# Altium PCB PCB3.PcbDoc
Units mil, origin at the board's own origin, x right, y up, seen from the top; angles counter-clockwise.
Board outline 2380 x 3440 mil, 2 copper layers (Top Layer, Bottom Layer); 76 components, 82 nets, 292 pads, 50 vias.
Unrouted connection lines stored in the file: 74.
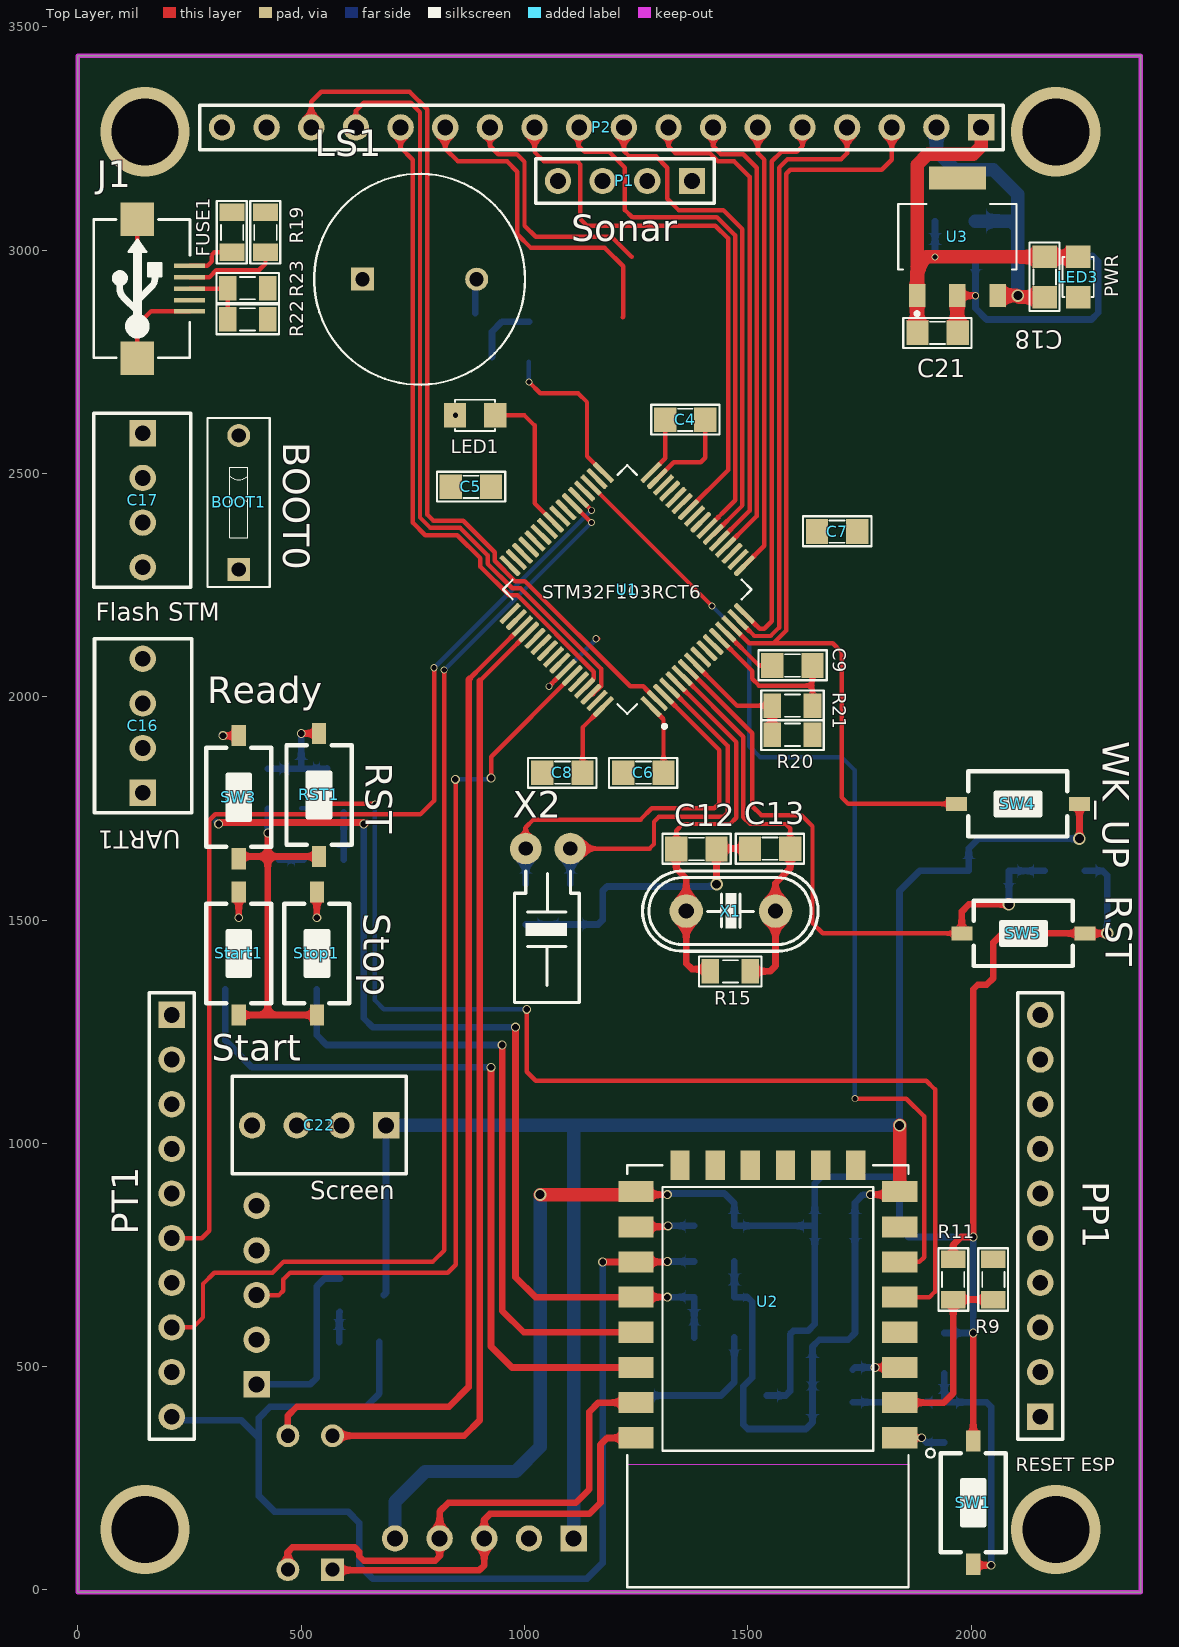
[diagram p0: Top Layer view]
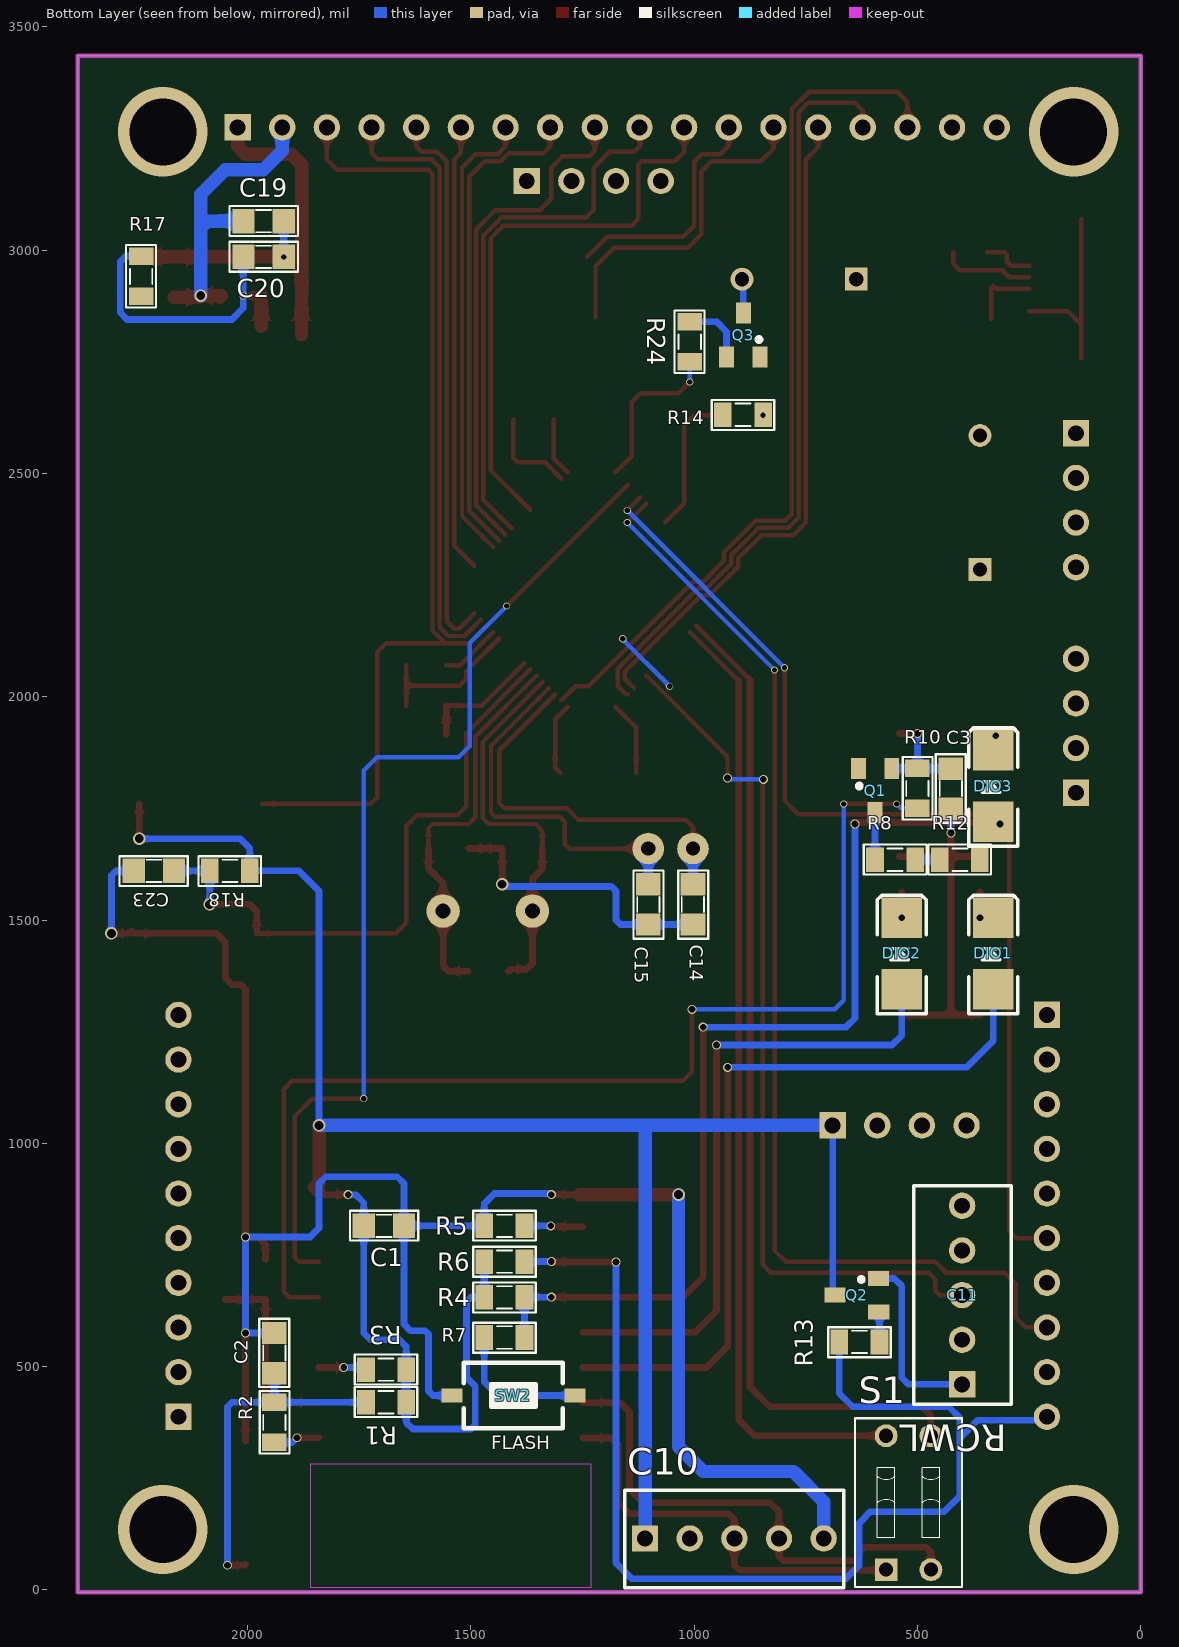
[diagram p1: Bottom Layer view, seen from below]
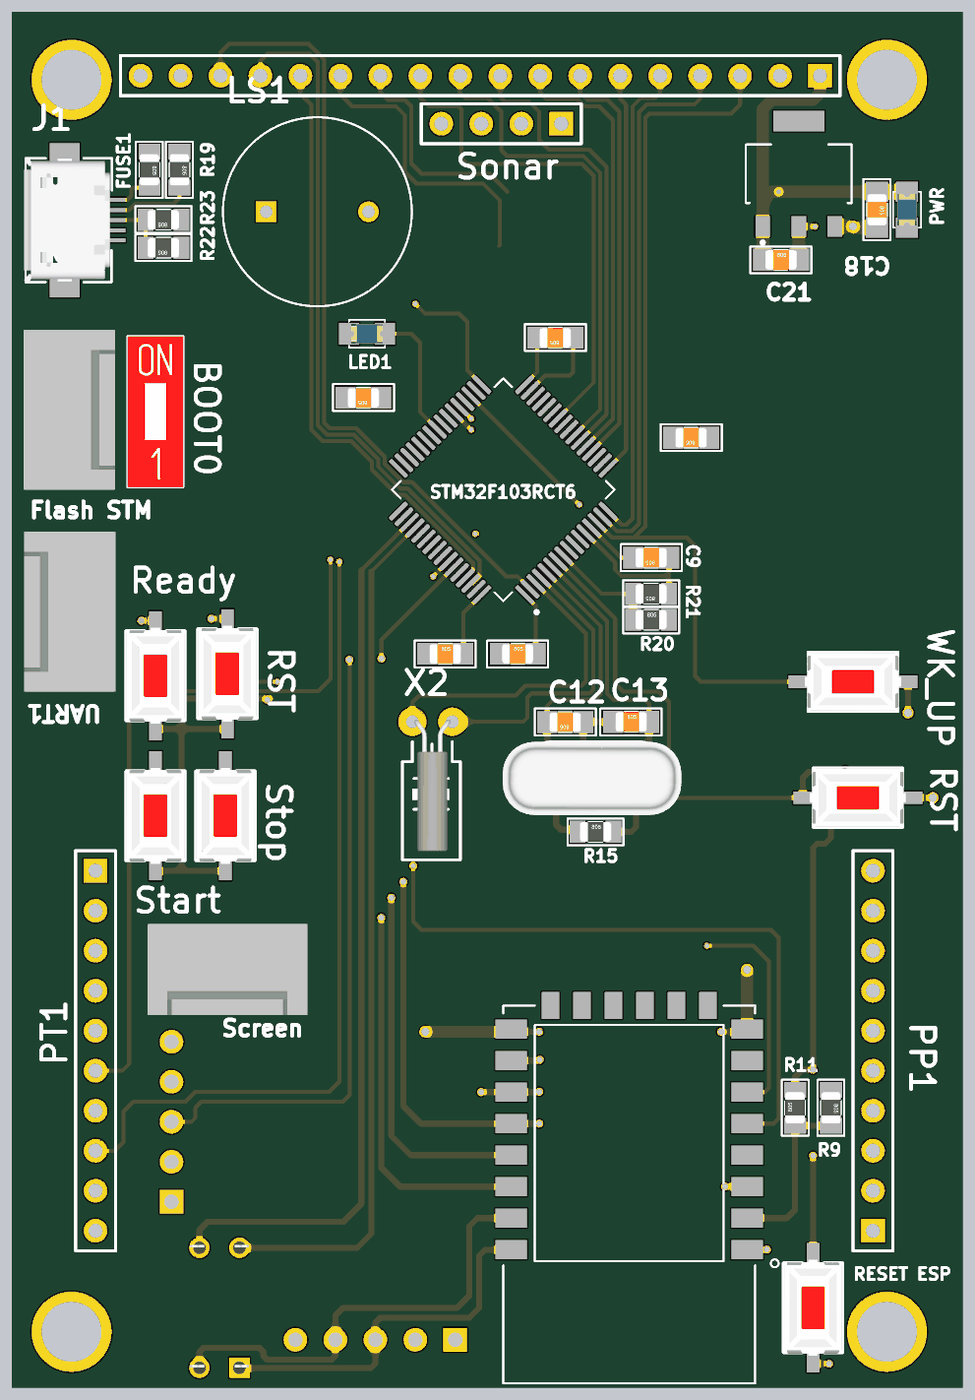
[diagram p2: 3D render of the assembled board from above, using the file's embedded part models]
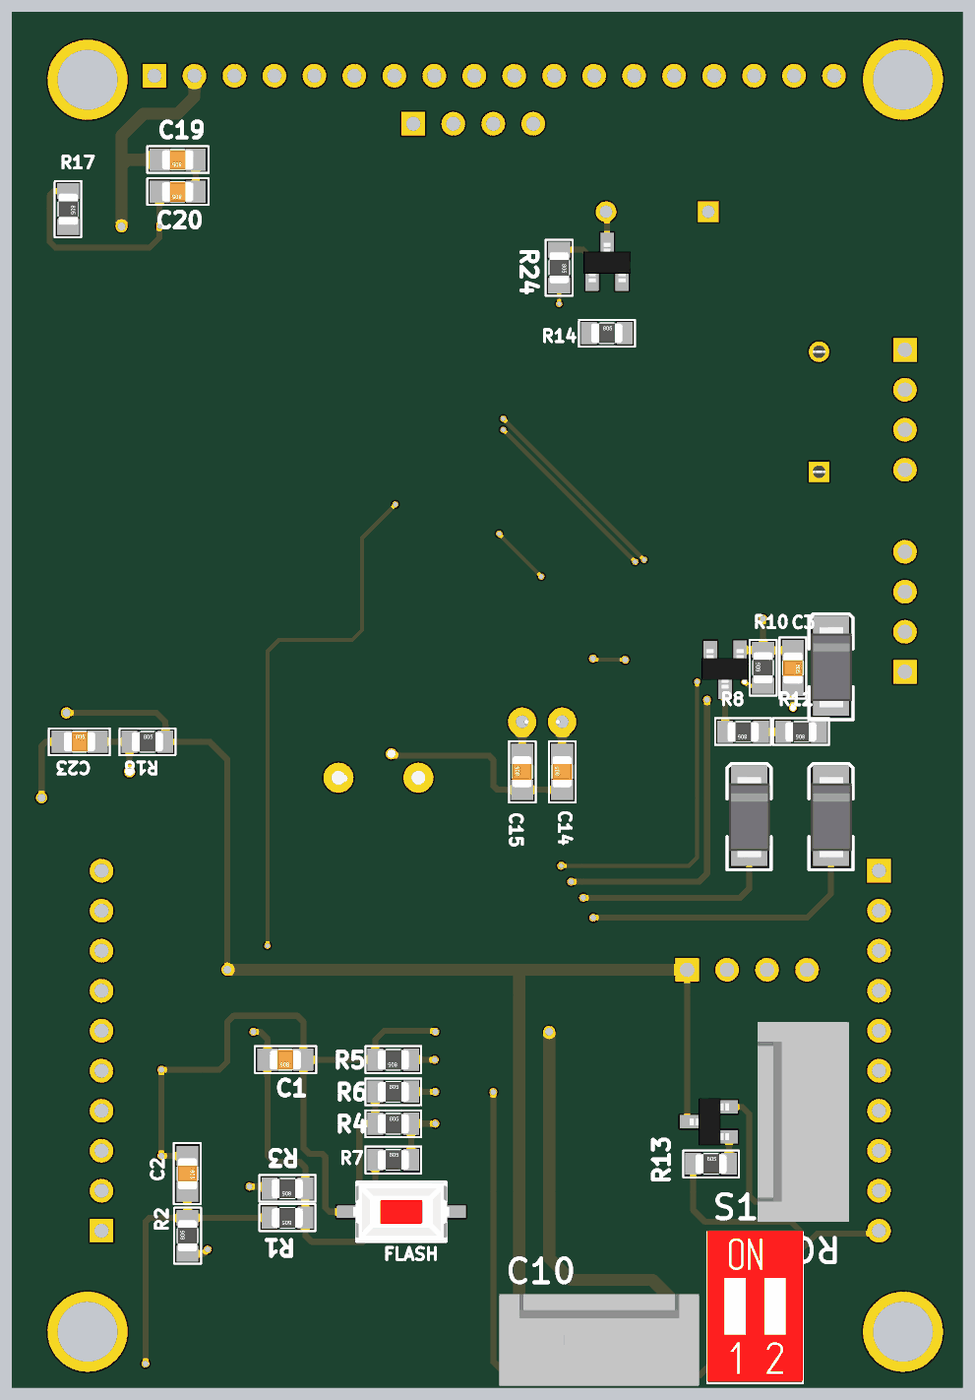
[diagram p3: 3D render of the assembled board from below, using the file's embedded part models]

## Layer stack, top to bottom
Top Solder: solder mask 0.4, Solder Resist, Dk 3.5
Top Layer: signal copper 1.4
Dielectric 1: dielectric 12.6, FR-4, Dk 4.8
Bottom Layer: signal copper 1.4
Bottom Solder: solder mask 0.4, Solder Resist, Dk 3.5

## Board outline
0,-5 0,3435 2380,3435 2380,-5

## Design rules (kind name [scope] priority, off if disabled: settings)
Clearance [All] p1: gap=6 ignorepadtopadclearanceinfootprint=FALSE
PolygonConnect [All] p1: connectstyle=Relief reliefconductorwidth=10 reliefentries=4 polygonreliefangle="90 Angle" airgapwidth=10
RoutingVias [All] p1: holewidth=15 width=20 viastyle="Through Hole" minholewidth=11.81 minwidth=16 maxholewidth=20 maxwidth=28
SolderMaskExpansion [All] p1: expansion=4
Width [All] p1: maxlimit=30 minlimit=10 preferedwidth=15
30 further rules are at their usual default settings.

## Components (designator, comment, footprint, x,y, rotation, side; value= is the part's Value field where it differs from the comment)
BOOT1 "BOOT0" SW-DIP1-1 360,2435 r0 top value="SW chip 2 pin"
C1 "104" SM-CAP-0805 1650,815 r0 bottom value=0,1uF/300V
C2 "104" SM-CAP-0805 1940,575 r270 bottom value=0,1uF/300V
C3 "103" SM-CAP-0805 425,1839 r270 bottom value=0,1uF/300V
C4 "104" SM-CAP-0805 1405,2620 r180 top value=0,1uF/300V
C5 "104" SM-CAP-0805 925,2470 r180 top value=0,1uF/300V
C6 "104" SM-CAP-0805 1221.29,1830 r0 top value=0,1uF/300V
C7 "104" SM-CAP-0805 1745,2370 r180 top value=0,1uF/300V
C8 "104" SM-CAP-0805 1040,1830 r0 top value=0,1uF/300V
C9 "104" SM-CAP-0805 1645,2070 r180 top value=0,1uF/300V
C10 "Flash ESP" HDR5 1110,115 r180 bottom
C11 "RCWL" HDR5 400,460 r90 bottom
C12 "20pF" SM-CAP-0805 1430,1659 r180 top value=0,1uF/300V
C13 "20pF" SM-CAP-0805 1505,1660 r0 top value=0,1uF/300V
C14 "12pF" SM-CAP-0805 1002.69,1490 r90 bottom value=0,1uF/300V
C15 "12pF" SM-CAP-0805 1102.69,1490 r90 bottom value=0,1uF/300V
C16 "UART1" HDR4 145,1785 r90 top
C17 "Flash STM" HDR4 145,2590 r270 top
C18 "106" SM-CAP-0805 2165,2985 r270 top value=0,1uF/300V
C19 "104" SM-CAP-0805 1919.37,3065 r0 bottom value=0,1uF/300V
C20 "104" SM-CAP-0805 1919.37,2985 r0 bottom value=0,1uF/300V
C21 "106" SM-CAP-0805 1880,2815 r0 top value=0,1uF/300V
C22 "Screen" HDR4 690,1040 r180 top
C23 "103" SM-CAP-0805 2255,1610 r180 bottom value=0,1uF/300V
DIO1 "Diode SMD" DIO-SMD-106 330,1425 r270 bottom value=1N5007
DIO2 "Diode SMD" DIO-SMD-106 535,1425 r270 bottom value=1N5007
DIO3 "Diode SMD" DIO-SMD-106 330,1800 r270 bottom value=1N5007
FUSE1 "500mA" RES-SMD-0805 345,3040 r270 top
J1 "USB-5" USB-M1 250,2913.82 r90 top
LED1 "DS0" LED-0805-Blue 844.19,2630.02 r0 top value="LED 3 - 5 ly 2 Colour"
LED3 "PWR" LED-0805-Blue 2240,2895 r90 top value="LED 3 - 5 ly 2 Colour"
LS1 "MCKPM-G1201A-K4037" XDCR_MCKPM-G1201A-K4037 765,2935 r0 top
P1 "Sonar" HDR1X4 1375,3155 r180 top
P2 "Header 18" HDR1X18 2022.5,3275 r180 top
PP1 "Header 10" HDR1X10 2155,387.5 r90 top
PT1 "Header 10" HDR1X10 210,1287.5 r270 top
Q1 "C1815" SOT23B 595,1790 r0 bottom
Q2 "C1815" SOT23B 635.79,660 r90 bottom
Q3 "C1815" SOT23B 890,2810 r180 bottom
R1 "10k" RES-SMD-0805 1690,420 r0 bottom
R2 "470" RES-SMD-0805 1940,375 r90 bottom
R3 "10k" RES-SMD-0805 1690,492.95 r0 bottom
R4 "10k" RES-SMD-0805 1425,655 r180 bottom
R5 "10k" RES-SMD-0805 1425,815 r0 bottom
R6 "10k" RES-SMD-0805 1425,735 r180 bottom
R7 "470" RES-SMD-0805 1425,565 r180 bottom
R8 "10k" RES-SMD-0805 550,1635 r0 bottom
R9 "10k" RES-SMD-0805 2050,695 r270 top
R10 "1k" RES-SMD-0805 500,1795 r90 bottom
R11 "20k" RES-SMD-0805 1960,695 r90 top
R12 "1k" RES-SMD-0805 405,1635 r0 bottom
R13 "1k" RES-SMD-0805 630,555 r180 bottom
R14 "1k" RES-SMD-0805 890.69,2631.52 r180 bottom
R15 "1M" RES-SMD-0805 1460.89,1385 r0 top
R17 "1k" RES-SMD-0805 2238.5,2941.5 r270 bottom
R18 "10k" RES-SMD-0805 2040,1610 r180 bottom
R19 "22" RES-SMD-0805 420,3040 r270 top
R20 "10k" RES-SMD-0805 1600,1915 r0 top
R21 "10k" RES-SMD-0805 1600,1980 r180 top
R22 "22" RES-SMD-0805 380,2845 r180 top
R23 "1k5" RES-SMD-0805 380,2915 r180 top
R24 "1k" RES-SMD-0805 1010,2795 r270 bottom
RST1 "RST" SW1-SMD 540,1780 r90 top value="SW chip 2 pin"
S1 "=partNo" SW-DIP2 520,195 r180 bottom
Start1 "Start" SW1-SMD 360,1425 r90 top value="SW chip 2 pin"
Stop1 "Stop" SW1-SMD 535,1425 r90 top value="SW chip 2 pin"
SW1 "RESET ESP" SW1-SMD 2005,195 r270 top value="SW chip 2 pin"
SW2 "FLASH" SW1-SMD 1405,435 r0 bottom value="SW chip 2 pin"
SW3 "Ready" SW1-SMD 360,1775 r90 top value="SW chip 2 pin"
SW4 "WK_UP" SW1-SMD 2105,1760 r180 top value="SW chip 2 pin"
SW5 "RST" SW1-SMD 2117.2,1470 r0 top value="SW chip 2 pin"
U1 "STM32F103RCT6" QFP50P1200X1200X160-64N 1230,2240 r135 top
U2 "ESP8266-12E/ESP-12E" XCVR_ESP8266-12E/ESP-12E 1545,616.06 r180 top
U3 "AMS1117-3.3" *SOT229P700X180-4N 1969.37,3030 r0 top
X1 "8Mhz" XT2 1462.24,1520 r0 top value=4Mhz
X2 "32.768kHZ" XT32k 1102.69,1660 r270 top value=4Mhz

## Footprints (in the part's own frame and the unit in brackets; to place one, negate y for a bottom-side part, rotate by r counter-clockwise, add the part's x,y. Pads: shape width x height; smd on the part's side, far side on the other; paste and mask are expansions set on the pad)
*SOT229P700X180-4N [mm]
  rect 0.93x1.31 smd: 1(-2.29,-3.345) 2(0,-3.345) 3(2.29,-3.345)
  rect 3.24x1.31 smd: 4(0,3.345)
  silkscreen extent -3.36,-4.47 3.36,1.86
DIO-SMD-106 [mil]
  rect 90x90.55 smd: 1(80,0) 2(-80,0)
  silkscreen extent -130,-55 135,55, body extent -99,-50 106,52, height 95
HDR1X4 [mm] "Connector; Header; 4 Position"
  rect 1.5x1.5 hole 0.9: 1(0,0)
  round 1.5 hole 0.9: 2(2.54,0) 3(5.08,0) 4(7.62,0)
  silkscreen extent -1.27,-1.27 8.89,1.27
HDR1X10 [mm] "Connector; Header; 10 Position"
  rect 1.5x1.5 hole 0.9: 1(0,0)
  round 1.5 hole 0.9: 2(2.54,0) 3(5.08,0) 4(7.62,0) 5(10.16,0) 6(12.7,0) 7(15.24,0) 8(17.78,0) 9(20.32,0) 10(22.86,0)
  silkscreen extent -1.27,-1.27 24.13,1.27
HDR1X18 [mm] "Connector; Header; 18 Position"
  rect 1.5x1.5 hole 0.9: 1(0,0)
  round 1.5 hole 0.9: 2(2.54,0) 3(5.08,0) 4(7.62,0) 5(10.16,0) 6(12.7,0) 7(15.24,0) 8(17.78,0) 9(20.32,0) 10(22.86,0) 11(25.4,0) 12(27.94,0) 13(30.48,0) 14(33.02,0) 15(35.56,0) 16(38.1,0) 17(40.64,0) 18(43.18,0)
  silkscreen extent -1.27,-1.27 44.45,1.27
HDR4 [mm] "Connector; Header; 4 Position"
  rect 1.5x1.5 hole 0.9: 1(0,0)
  round 1.5 hole 0.9: 2(2.54,0) 3(5.08,0) 4(7.62,0)
  silkscreen extent -1.14,-2.79 8.76,2.74, body extent -1.27,-2.92 8.89,2.88, height 11.72
HDR5 [mm] "Connector; Header; 5 Position"
  rect 1.5x1.5 hole 0.9: 1(0,0)
  round 1.5 hole 0.9: 2(2.54,0) 3(5.08,0) 4(7.62,0) 5(10.16,0)
  silkscreen extent -1.14,-2.79 11.3,2.74, body extent -1.27,-2.92 11.43,2.88, height 11.72
LED-0805-Blue [mil]
  rect 50x55 smd: 1(0,0) 2(90,0)
  silkscreen extent 0,-35 90,35, body extent 5,-25 85,25, height 43
QFP50P1200X1200X160-64N [mm]
  rrect50% 1.49x0.28 smd: 1(-5.67,3.75) 2(-5.67,3.25) 3(-5.67,2.75) 4(-5.67,2.25) 5(-5.67,1.75) 6(-5.67,1.25) 7(-5.67,0.75) 8(-5.67,0.25) 9(-5.67,-0.25) 10(-5.67,-0.75) 11(-5.67,-1.25) 12(-5.67,-1.75) 13(-5.67,-2.25) 14(-5.67,-2.75) 15(-5.67,-3.25) 16(-5.67,-3.75) 33(5.67,-3.75) 34(5.67,-3.25) 35(5.67,-2.75) 36(5.67,-2.25) 37(5.67,-1.75) 38(5.67,-1.25) 39(5.67,-0.75) 40(5.67,-0.25) 41(5.67,0.25) 42(5.67,0.75) 43(5.67,1.25) 44(5.67,1.75) 45(5.67,2.25) 46(5.67,2.75) 47(5.67,3.25) 48(5.67,3.75)
  rrect50% 0.28x1.49 smd: 17(-3.75,-5.67) 18(-3.25,-5.67) 19(-2.75,-5.67) 20(-2.25,-5.67) 21(-1.75,-5.67) 22(-1.25,-5.67) 23(-0.75,-5.67) 24(-0.25,-5.67) 25(0.25,-5.67) 26(0.75,-5.67) 27(1.25,-5.67) 28(1.75,-5.67) 29(2.25,-5.67) 30(2.75,-5.67) 31(3.25,-5.67) 32(3.75,-5.67) 49(3.75,5.67) 50(3.25,5.67) 51(2.75,5.67) 52(2.25,5.67) 53(1.75,5.67) 54(1.25,5.67) 55(0.75,5.67) 56(0.25,5.67) 57(-0.25,5.67) 58(-0.75,5.67) 59(-1.25,5.67) 60(-1.75,5.67) 61(-2.25,5.67) 62(-2.75,5.67) 63(-3.25,5.67) 64(-3.75,5.67)
  silkscreen extent -7.1,-5 5,5
RES-SMD-0805 [mil]
  rect 39.37x55 smd: 1(-45,0) 2(45,0)
  silkscreen extent -70,-34 70,33, body extent -39,-25 39,25, height 31
SM-CAP-0805 [mil]
  rect 50x55 smd: 1(0,0) 2(90,0)
  silkscreen extent -32,-34 121,33, body extent 6,-25 84,25, height 31
SOT23B [mm] "SOT 23B"
  rect 0.85x1.2 smd: 1(0.94,-1.245) 2(0,1.25) 3(-0.95,-1.25)
  silkscreen extent 0.77,-0.38 1.02,-0.13, body extent -1.5,-1.3 1.5,1.2, height 1.06
SW1-SMD [mm]
  rect 1.2x0.8 smd: 1(-3.5,0) 2(3.5,0)
  silkscreen extent -2.82,-1.85 2.82,1.85, body extent -3.05,-1.85 3.05,1.85, height 2.5
SW-DIP1-1 [mm] "01p, 2.54mm Pitch, Horizontal, Box Type, THT, flat Actuator, red, without Tape, Tube"
  rect 1.3x1.3 hole 0.8: 1(0,-3.81)
  round 1.3 hole 0.8: 2(0,3.81)
  silkscreen extent -1.77,-4.8 1.77,4.8, body extent -1.77,-4.8 1.77,4.8, height 5.4
SW-DIP2 [mm] "02p, 2.54mm Pitch, Horizontal, Box Type, THT, flat Actuator, red, without Tape, Tube"
  rect 1.3x1.3 hole 0.8: 1(-1.27,-3.81)
  round 1.3 hole 0.8: 2(1.27,-3.81) 3(1.27,3.81) 4(-1.27,3.81)
  silkscreen extent -3.04,-4.8 3.04,4.8, body extent -3.04,-4.7 3.04,4.9, height 5.4
USB-M1 [mil]
  rect 10x70 smd: 1(51.18,0) 2(25.59,0) 3(0,0) 4(-25.59,0) 5(-50,0)
  rect 74.8x74.8 smd: 5(-155.51,116.84) 5(155.51,116.84)
  silkscreen extent -155,-1 155,215, body extent -157,5 158,218, height 107
XCVR_ESP8266-12E/ESP-12E [mm]
  rect 2x1.2 smd: 1(-7.5,7) 2(-7.5,5) 3(-7.5,3) 4(-7.5,1) 5(-7.5,-1) 6(-7.5,-3) 7(-7.5,-5) 8(-7.5,-7) 15(7.5,-7) 16(7.5,-5) 17(7.5,-3) 18(7.5,-1) 19(7.5,1) 20(7.5,3) 21(7.5,5) 22(7.5,7)
  rect 1.1x1.7 smd: 9(-5,-8.5) 10(-3,-8.5) 11(-1,-8.5) 12(1,-8.5) 13(3,-8.5) 14(5,-8.5)
  Keep-Out Layer region: 8,8.51 -8.009,8.51 -8.009,15.5 8,15.5
  Keep-Out Layer region: 8,8.51 -8.009,8.51 -8.009,15.5 8,15.5
  silkscreen extent -9.5,-8.5 8,15.5
XDCR_MCKPM-G1201A-K4037 [mm]
  rect 1.308x1.308 hole 0.8: 1(-3.25,0)
  round 1.308 hole 0.8: 2(3.25,0)
  silkscreen extent -6,-6 6,6
XT2 [mil] "Footpin for Crystal 2 pin"
  round 75 hole 34: 1(-100,0) 2(100,0)
  silkscreen extent -198,-90 195,90, body extent -233,-93 213,90, height 138
XT32k [mm]
  round 1.8 hole 0.813: 1(0,0) 2(0,-2.54)
  silkscreen extent 1.27,-3.17 8.76,0.51, body extent -0.15,-2.42 8.2,-0.12, height 1.95

## Part data
BOOT1 RST1 Start1 Stop1 SW1 SW2 SW3 SW4 SW5: library part SW2, "Switch button 2 pin"
C1 C2 C3 C4 C5 C6 C7 C8 C9 C12 C13 C14 C15 C18 C19 C20 C21 C23: library part CN, Designed by=VanDungEvn
C10 C11: library part Header5, "Header IDC, 5 x 1 Pin Vertical 2.54mm Pitch (Non-Boxed, Male)", Manufacturer="Würth Elektronik eiSos GmbH", partNo=613002143121, ComponentLink1 Description=Manufacturer, ComponentLink1URL=http://www.we-online.com, ComponentLink2 Description=Datasheet, ComponentLink2URL=http://katalog.we-online.de/em/datasheet/6130xx143121.pdf, Created by="Karrer Zheng", Created Date="29 March 2013", NoPins=02
C16 C17 C22: library part Header4, "Header IDC, 4 x 1 Pin Vertical 2.54mm Pitch (Non-Boxed, Male)", Manufacturer="Würth Elektronik eiSos GmbH", partNo=613002143121, ComponentLink1 Description=Manufacturer, ComponentLink1URL=http://www.we-online.com, ComponentLink2 Description=Datasheet, ComponentLink2URL=http://katalog.we-online.de/em/datasheet/6130xx143121.pdf, Created by="Karrer Zheng", Created Date="29 March 2013", NoPins=02
DIO1 DIO2 DIO3: "Default Diode", Code - JEDEC=DO-214-AB, Published=8-Jun-2000, Publisher="Altium Limited", Revision="July-2002: Re-released for DXP Platform."
FUSE1 R1 R2 R3 R4 R5 R6 R7 R8 R9 R10 R11 R12 R13 R14 R15 R17 R18 R19 R20 R21 R22 R23 R24: library part Res-SMD, "Resistor", Manufacturer="Generic Components", Class=Passive, Published=08/06/2000, Publisher="Altium Hobart Technology Centre"
J1: Manufacturer=FCI, Manufacturer Part Number=10118193-0001LF, Supplier Part Number 1=609-4616-1-ND, .Checked PCB=RF, .Checked SCH=MM, .Creator=MM, Category="Connectors, Interconnects", ComponentLink1Description=http://portal.fciconnect.com/Comergent//fci/drawing/10118193.pdf, ComponentLink1URL=http://portal.fciconnect.com/Comergent//fci/drawing/10118193.pdf, Connector Type="USB - micro B", Features="Shielded, Solder Retention", Gender=Receptacle, Ingress Protection=-, Mounting Type="Surface Mount, Right Angle, Horizontal", Number of Contacts=5, Packaging="Cut Tape (CT)", Pricing 1="1=0.46, 10=0.433, 25=0.3712, 50=0.3156, 100=0.3032, 250=0.27224, 500=0.25988 (USD)", RoHS="RoHS Compliant", Specifications="USB 2.0", Stock 1=28642, Supplier 1=Digi-Key
LED1 LED3: library part "LED SMD"
LS1: "Zumbador y transductor magnéticos", Package=None, Availability=Unavailable, MF=Multicomp, MP=MCKPM-G1201A-K4037, Price=None, SnapEDA_Link=https://www.snapeda.com/parts/MCKPM-G1201A-K4037/Multicomp/view-part/231709/?ref=snap
P1: library part "Header 4", "Header, 4-Pin", LatestRevisionDate=17-Jul-2002, LatestRevisionNote="Re-released for DXP Platform.", Publisher="Altium Limited"
P2: "Header, 18-Pin", LatestRevisionDate=17-Jul-2002, LatestRevisionNote="Re-released for DXP Platform.", Publisher="Altium Limited"
PP1 PT1: "Header, 10-Pin", LatestRevisionDate=17-Jul-2002, LatestRevisionNote="Re-released for DXP Platform.", Publisher="Altium Limited"
Q1 Q2 Q3: "NPN 600mW, ECB", =C2383
S1: library part SWDIP2, "WS-DITV 2.54 mm small compact THT flat actuator with top tape", Manufacturer="Wurth Elektronik", Part No.=418127160902, ComponentLink1 Description=Manufacturer, ComponentLink1URL=http://www.we-online.com, ComponentLink2 Description=Datasheet, ComponentLink2URL=http://katalog.we-online.de/em/datasheet/4181271609xx.pdf, Created by="Baojun Chen", Created Date=Dec.2015, Pole=02
U1: "ARM® Cortex®-M3 STM32F1 Microcontroller IC 32-Bit 72MHz 256KB _256K x 8_ FLASH", Package="LQFP-64 STMicroelectronics", Availability=Unavailable, MF=STMicroelectronics, MP=STM32F103RCT6, Price=None, SnapEDA_Link=https://www.snapeda.com/parts/STM32F103RCT6/STMicroelectronics/view-part/44152/?ref=snap
U2: "This WiFi module has a 32-bit MCU micro and clock speeds supporting 80 MHz or 160 MHz. Supports the RTOS and integrated Wi-Fi MAC/BB/RF/PA/LNA, and has an on-board antenna.", Package=None, Availability=Unavailable, MF=AI-Thinker, MP=ESP8266-12E/ESP-12E, Price=None, SnapEDA_Link=https://www.snapeda.com/parts/ESP8266-12E/ESP-12E/AI-Thinker/view-part/106414/?ref=snap
U3: "Sot223/Pkg 1-Amp 3.3-Volt Low Drop Out Voltage Regulatator", Package=None, Availability=Unavailable, MF="Advanced Monolithic Systems", MP=AMS1117-3.3, Price=None, SnapEDA_Link=https://www.snapeda.com/parts/AMS1117-3.3/Advanced%20Monolithic%20Systems/view-part/53450/?ref=snap
X1: library part XT2, "Crystal For all Crystal 2pin."
X2: library part XT2, "Crystal, 32.768 KHz, -40 to 85 degC, 3.2 x 1.5 x 0.9 mm SMD"

## Via types
v1: diameter 20, hole 15, Top Layer to Bottom Layer, 24 vias
v2: diameter 16, hole 11.81, Top Layer to Bottom Layer, 15 vias
v3: diameter 28, hole 20, Top Layer to Bottom Layer, 7 vias
v4: diameter 200, hole 150, Top Layer to Bottom Layer, 4 vias

## Nets (pads, with @x,y where several pads share a name; then routed paths per layer and width w, separated by ;. In a path a pad name is that pad's centre, name@x,y a point inside that pad or via, vN(x,y) a via of type N, cw(c..) or ccw(c..) an arc to the next point about the centre after c; other vN are vias at no path point)
"32.768 <": C14.2 U1.3 X2.2 | length 879.8
  Top Layer w10: X2.2 1002.69,1707.69 1020,1725 1260,1725 1285,1750 1425,1750 1436.56,1761.56 1436.56,1880.32 U1.3
  Bottom Layer w15: C14.2 X2.2
32.786>: C15.2 U1.4 X2.1 | length 828
  Top Layer w10: X2.1 1280,1660 1290,1670 1290,1720 1301,1731 1446,1731 1455,1740 1455,1889.73 U1.4
  Bottom Layer w15: C15.2 X2.1
B+: PT1.5 R9.1 R20.2
BatInfo(ADC3): R20.1 R21.2 U1.8 | length 278.5
  Top Layer w10: U1.8 1476.08,1980 R21.2
  Top Layer w15: R20.1 R21.2
Block(ADC3): P2.12 U1.9 | length 545.5
  Top Layer w10: P2.12 922.5,3233.92 941.42,3215 983.1,3215 1000,3198.1 1000,3055 1025,3030 1195,3030 1240,2985
BOOT0: BOOT1.1 U1.60
Buzzer: R24.2 U1.33 | length 366.5
  Top Layer w10: v2(1010,2705) 1035,2680 1120,2680 1140,2660 1140,2538.79 U1.33
  Bottom Layer w10: v2(1010,2705) R24.2
"Charge Ctrl": PT1.7 U1.27
CLK: C17.4 U1.49
DIO: C17.3 U1.46
Get-IP: U1.35 U2.6 | length 2272
  Top Layer w10: U1.35 v2(1420,2203.11) ; v2(1740,1100) 1855,1100 1895,1060 1895,745 1884.17,734.17 U2.6
  Bottom Layer w10: v2(1420,2203.11) 1503.11,2120 1503.11,1889.39 1527.5,1865 1710,1865 1740,1835 v2(1740,1100)
GND: C1.1 C2.1 C4.1 C5.1 C6.1 C7.1 C8.1 C9.1 C10.5 C11.2 C12.1 C13.1 C14.1 C15.1 C16.2 C17.2 C18.1 C19.1 C20.1 C21.1 C22.2 C23.1 J1.5 LED3.2 P1.1 P2.1 PT1.1 PT1.2 PT1.3 PT1.4 Q1.1 Q3.1 R5.2 R11.2 R21.1 SW1.1 SW2.2 SW5.2 U1.12 U1.18 U1.31 U1.47 U1.63 U2.15 U3.1 | length 7183.8
  Top Layer w10: J1.5@133.16,2758.31 133.16,2833.16 ; J1.5@133.16,3069.33 133.16,2833.16 ; J1.5@250,2863.82 163.82,2863.82 133.16,2833.16 ; U1.31 1334.05,2525 1395,2525 1405,2535 C4.1 ; U1.12 1510,2057.44 1510,2040 1525,2025 1645,2025 ; R21.1 1645,2025 ; C9.1 1645,2025
  Top Layer w15: U2.15@1256.38,885 v1(1320,885) ; v3(1430,1580) C12.1 1431,1660 C13.1 ; R11.2 1960,772.5 1977.5,790 v1(2005,790) 2005,1345 2015,1355 2035,1355 2050,1370 2050,1450 2070,1470 SW5.2 2260,1475 2265,1470 v3(2305,1470) ; SW1.1 v1(2005,575)
  Top Layer w30: v3(1035,885) U2.15@1256.38,885 ; C21.1@1879.37,2810 1879.37,2898.15 U3.1 1879.21,2964.21 ; P2.1 2022.5,3232.5 2005,3215 1902.5,3215 1879.21,3191.71 1879.21,2964.21 ; LED3.2 C18.1 1900,2985 1879.21,2964.21
  Bottom Layer w15: C14.1 C15.1 1165,1490 1175,1500 1175,1565 1185,1575 1425,1575 v3(1430,1580) ; v1(1320,885) 1320,887.5 1447.5,887.5 1470,865 R5.2 C1.1 ; SW2.2 1585,435 1595,445 1595,572.5 1602.5,580 1635,580 1650,595 C1.1 ; v2(1919.37,2985) C19.1 ; C2.1 v1(2005,575) v1(2005,790) 1860,790 1840,810 1840,910 1825,925 1665,925 1650,910 C1.1 ; C23.1 2295,1610 2305,1600 v3(2305,1470)
  Bottom Layer w30: C10.5 710,197.5 777.5,265 980,265 1035,320 v3(1035,885)
"IT block": P2.14 U1.61 | length 1496.1
  Top Layer w10: P2.14 722.5,3230 749.97,3202.53 749.97,2390.03 778.03,2361.97 849.37,2361.97 901.26,2310.08 901.26,2291.34 965.65,2226.95 984.39,2226.95 1155.37,2055.98 1155.37,2040.09 U1.61
"IT charge": P2.15 U1.62 | length 1738.5
  Top Layer w10: P2.15@630,3275 P2.15 622.5,3312.5 640,3330 745,3330 765.97,3309.03 765.97,2401.4 789.4,2377.97 856,2377.97 917.26,2316.71 917.26,2297.97 972.28,2242.95 991.02,2242.95 1171.37,2062.6 1171.37,2023.77 1153.56,2005.96 1148.35,2005.96 U1.62
LCD-SCL: C22.3 U1.29
LCD-SDA: C22.4 U1.30
"Left backward": PT1.8 U1.38 | length 2552.8
  Top Layer w10: PT1.8 257.5,587.5 280,610 280,685 305,710 435.63,710 460.63,735 795,735 820,760 v2(820,2060) ; U1.38 1149.6,2390 v2(1150,2390)
  Bottom Layer w10: v2(820,2060) v2(1150,2390)
"Left forward": PT1.6 U1.37 | length 2369.3
  Top Layer w10: PT1.6 277.5,787.5 294,804 294,1723.7 307.3,1737 767,1737 797.56,1767.56 v2(797.56,2065) ; U1.37 v2(1150,2417.44)
  Bottom Layer w10: v2(797.56,2065) v2(1150,2417.44)
Line1: P2.3 SW4.2 U1.14 | length 2243.1
  Top Layer w10: U1.14 1503.11,2120 1557.63,2120 ; P2.3 1822.5,3202.5 1800,3180 1595,3180 1586,3171 1586,2148.37 1557.63,2120 ; SW4.2 1725,1760 1710,1775 1710,2100 1690,2120 1557.63,2120
Line2: P2.4 U1.15 | length 1368.2
  Top Layer w10: U1.15 1514.95,2136 1551,2136 1570,2155 1570,3185 1589,3204 1709,3204 1722.5,3217.5 P2.4
Line3: P2.5 U1.16 | length 1238
  Top Layer w10: U1.16 1526.79,2152 1537,2152 1554,2169 1554,3199 1575,3220 1610,3220 1622.5,3232.5 P2.5
Line4: P2.6 U1.17 | length 1006.1
  Top Layer w10: U1.17 1537,2338.21 1537,3203 1522.5,3217.5 P2.6
Line5: P2.7 U1.20 | length 1038.3
  Top Layer w10: P2.7 1422.5,3232.5 1440,3215 1490,3215 1520,3185 1520,2404.73 U1.20
Line6: P2.8 U1.21 | length 1095.4
  Top Layer w10: P2.8 1322.5,3232.5 1337.5,3217.5 1414.87,3217.5 1433.37,3199 1469.32,3199 1504,3164.32 1504,2416.56 U1.21
Line7: P2.9 U1.22 | length 1142.7
  Top Layer w10: P2.9 1222.5,3222.5 1235,3210 1295,3210 1320,3185 1320,3115 1345,3090 1445,3090 1488,3047 1488,2428.4 U1.22
Line8: P2.10 U1.23 | length 1214
  Top Layer w10: P2.10 1120.87,3273.37 1120.87,3233.92 1134.79,3220 1190,3220 1225,3185 1225,3090 1241,3074 1431,3074 1472,3033 1472,2440.24 U1.23
Line9: P2.11 U1.26 | length 1284.7
  Top Layer w10: P2.11 1022.5,3220 1043.5,3199 1117.95,3199 1125,3191.95 1125,3070 1140,3055 1427.37,3055 1456,3026.37 1456,2507.76 U1.26
NetC2_2: C2.2 R1.2 R2.2 SW1.2 | length 775.1
  Top Layer w15: SW1.2 2007.2,55 v1(2045,55)
  Bottom Layer w15: R1.2 R2.2 ; C2.2 R2.2 ; v1(2045,55) 2045,410 2035,420 R2.2
NetC3_1: C3.1 Q1.3 R10.2 RST1.2 | length 250.5
  Top Layer w15: v1(500,1917.8) RST1.2
  Bottom Layer w15: C3.1 557.39,1839 Q1.3 ; R10.2 v1(500,1917.8)
NetC3_2: C3.2 R12.1 RST1.1 Start1.1 Stop1.1 SW3.1 | length 818.9
  Top Layer w15: Start1.1 425,1287.2 ; SW3.1 365,1642.2 425,1642.2 ; v1(425,1695) 425,1642.2 ; Stop1.1 425,1287.2 ; RST1.1 425,1642.2 ; 425,1287.2 425,1642.2
  Bottom Layer w15: v1(425,1695) C3.2
NetC10_3: C10.3 S1.1 U2.22 | length 939
  Top Layer w15: S1.1 571,44 899,44 910,55 C10.3 910,157.31 922.69,170 1145,170 1170,195 1170,325 1185,340 1249.25,340 U2.22
NetC10_4: C10.4 S1.2 U2.21 | length 1149
  Top Layer w15: S1.2 470,85 480,95 620,95 630,85 630,75 640,65 800,65 810,75 C10.4 810,175 830,195 1115,195 1145,225 1145,398.35 1165.87,419.21 U2.21
NetC11_1: C11.1 Q2.1 | length 405
  Bottom Layer w15: C11.1 520,460 535,475 535,680 552,697 Q2.1
NetC16_3: C16.3 U1.43
NetDIO1_1: DIO1.1 U2.20 | length 1704.1
  Top Layer w15: v1(925,1170) 925,545 972.05,497.95 U2.20
  Bottom Layer w15: DIO1.1 330,1230 390,1170 v1(925,1170)
NetDIO2_1: DIO2.1 U2.19 | length 1441.8
  Top Layer w15: v1(950,1220) 950,625 998.31,576.69 U2.19
  Bottom Layer w15: DIO2.1 535,1242 557,1220 v1(950,1220)
NetDIO3_1: DIO3.1 R4.2 R7.2 U2.18 | length 2199.9
  Top Layer w15: v1(315,1715) 318.5,1718.5 646.5,1718.5 643,1715 v1(640,1715) ; v1(980,1260) 980,700 1024.57,655.43 U2.18 v1(1320,655.43)
  Bottom Layer w15: DIO3.1@310,1720 v1(315,1715) ; v1(640,1715) 640,1465 640,1280 660,1260 v1(980,1260) ; v1(1320,655.43) 1379.57,655.43 R4.2 R7.2
NetFUSE1_2: FUSE1.2 J1.1 | length 116.2
  Top Layer w10: J1.1 290,2965 300,2975 300,2990 305,2995 FUSE1.2
NetJ1_2: J1.2 R19.2 | length 207.7
  Top Layer w10: J1.2 294.41,2939.41 310,2955 405,2955 420,2970 R19.2
NetJ1_3: J1.3 R22.2 R23.2 | length 152.6
  Top Layer w10: J1.3 323.82,2913.82 R23.2@330,2920 ; R22.2 R23.2
NetLED1_1: LED1.1 R14.2 | length 1.8
  Top Layer w10: LED1.1@845,2630 v2(845.69,2630.69)
  Bottom Layer w10: v2(845.69,2630.69) R14.2
NetLED1_2: LED1.2 U1.41 | length 331.9
  Top Layer w10: LED1.2 999.98,2630.02 1022.5,2607.5 1022.5,2433.58 U1.41
NetLED3_1: LED3.1 R17.2
NetLS1_2: LS1.2 Q3.2 | length 77
  Bottom Layer w15: Q3.2 890,2932.05 LS1.2
NetP1_2: P1.2 R5.1 U2.16 | length 131.1
  Top Layer w15: U2.16 1319.17,812.91 v1(1321.26,815)
  Bottom Layer w15: v1(1321.26,815) R5.1
NetP1_3: P1.3 U2.7
NetQ2_3: Q2.3 R13.2 | length 68.2
  Bottom Layer w15: R13.2 585,621.03 Q2.3
NetQ3_3: Q3.3 R24.1 | length 148.6
  Bottom Layer w15: Q3.3 927.4,2817.4 950,2840 R24.1
NetR2_1: R2.1 U2.1 | length 104.1
  Top Layer w15: U2.1 v1(1889.53,340.47)
  Bottom Layer w15: v1(1889.53,340.47) 1900,330 R2.1
NetR3_2: R3.2 U2.3 | length 107.3
  Top Layer w15: v1(1785,497.95) U2.3
  Bottom Layer w15: R3.2 1740,497.95 v1(1785,497.95)
NetR7_1: R7.1 SW2.1 | length 315.2
  Bottom Layer w15: SW2.1 1440,435 1470,465 R7.1
NetR9_2: R9.2 R11.1 U2.2 | length 428.3
  Top Layer w15: U2.2 1939.21,419.21 1960,440 R11.1 R9.2
NetR10_1: R10.1 U2.5 | length 2565.1
  Top Layer w10: v2(546.56,1760) v2(665,1760) ; v2(1005,1300) 1005,1160 1025,1140 1900,1140 1919.37,1120.63 1919.37,667.87 1906.93,655.43 U2.5
  Bottom Layer w10: R10.1 536.56,1750 v2(546.56,1760) ; v2(665,1760) 665,1320 685,1300 v2(1005,1300)
  other v1: 1005,1300
NetU1_10: U1.10
NetU1_11: U1.11
NetU1_24: U1.24
NetU1_25: U1.25
NetU1_28: U1.28
NetU1_34: U1.34
NetU1_36: U1.36
NetU1_50: U1.50
NetU1_53: U1.53
NetU1_54: U1.54
NetU2_4: U2.4
"OSC 8M-In": C12.2 R15.1 U1.5 X1.1 | length 873.8
  Top Layer w10: U1.5 1474,1898.56 1474,1729 1460,1715 1355,1715 1340,1700 C12.2
  Top Layer w15: C12.2 1340,1615 1362.24,1592.76 X1.1 1362.24,1402.76 1375,1390 1410.88,1390 R15.1
"OSC 8M-Out": C13.2 R15.2 U1.6 X1.2 | length 872.2
  Top Layer w10: U1.6 1490,1910.4 1490,1730 1505,1715 1585,1715 1595,1705 C13.2
  Top Layer w15: R15.2 1550,1385 1562.24,1397.24 X1.2 1562.24,1582.24 1595,1615 C13.2
Pause: DIO2.2 Stop1.2 U1.56 | length 57.8
  Top Layer w15: v1(535,1505) Stop1.2
RCWL: C11.3 U1.59 | length 1962.6
  Top Layer w10: C11.3 450,660 460,670 460,695 475,710 828.25,710 846,727.75 846,1814 v1(845,1815) ; v1(925.4,1818) 925.4,1865.8 U1.59
  Bottom Layer w10: v1(845,1815) 922.4,1815 v1(925.4,1818)
Ready: DIO3.2 SW3.2 U1.57 | length 38.4
  Top Layer w15: v1(324.7,1912.8) SW3.2
  Bottom Layer w15: DIO3.2@322.5,1915 v1(324.7,1912.8)
"RESET STM": C23.2 Q1.2 R8.2 R18.1 SW5.1 U1.7 | length 1502.3
  Top Layer w10: U1.7 1510,1918.24 1510,1755 1530,1735 1620,1735 1645,1710 1645,1493.11 1668.11,1470 SW5.1
  Top Layer w15: SW5.1 1979.41,1519.41 1995,1535 v3(2085,1535)
  Bottom Layer w15: R8.2 Q1.2 ; v3(2085,1535) R18.1 C23.2
"Right backward": PP1.2 U1.40
"Right forward": PP1.3 U1.39
"Running light": P2.16 U1.2 | length 1949.1
  Top Layer w10: P2.16 522.5,3332.5 545,3355 742.63,3355 781.97,3315.66 781.97,2408.03 796.03,2393.97 862.63,2393.97 933.26,2323.34 933.26,2304.6 978.9,2258.95 1001.05,2258.95 1236.76,2023.24 1265.81,2023.24 U1.2
RX-ESP: S1.4 U1.52 | length 2154.7
  Top Layer w10: 900,2035.27 U1.52
  Top Layer w15: S1.4 865,345 900,380 900,2035.27
Start: DIO1.2 Start1.2 U1.55 | length 57.8
  Top Layer w15: v1(360,1505) Start1.2
"Stop light": P2.13 U1.58 | length 963.4
  Top Layer w10: P2.13 822.5,3227.5 851,3199 961,3199 984,3176 984,3035.52 1014.52,3005 1180,3005 1221,2964 1221,2851 1220,2850 ; v2(1055,2023.24) U1.58 ; v2(1160,2130) v2@1165,2130
  Bottom Layer w10: v2(1055,2023.24) 1161.76,2130 v2(1160,2130)
Torch: C16.4 PT1.10 R6.2 R13.1 U1.42 U2.17 | length 2593.7
  Top Layer w15: v1(1175,734.17) U2.17 1319.17,734.17 v1(1320,735)
  Bottom Layer w15: PT1.10 217.5,380 365,380 405,340 ; R13.1 675,440 645,410 430,410 405,385 405,340 ; v1(1175,734.17) 1175,60 1140,25 660,25 630,55 630,150 605,175 440,175 405,210 405,340 ; v1(1320,735) R6.2
TX-ESP: S1.3 U1.51 | length 2231
  Top Layer w10: 876.89,2040 U1.51
  Top Layer w15: S1.3 470,390 490,410 830.79,410 875,454.21 875,1820 875,2038.11 876.89,2040
"USB D+": R22.1 U1.45
"USB D-": R19.1 U1.44
VCC3.3: BOOT1.2 C1.2 C4.2 C5.2 C6.2 C7.2 C8.2 C9.2 C10.1 C17.1 C20.2 C21.2 C22.1 P1.4 P2.17 P2.18 Q2.2 R1.1 R3.1 R4.1 R6.1 R8.1 R12.2 R14.1 R17.1 R18.2 R23.1 SW4.1 U1.1 U1.13 U1.19 U1.32 U1.48 U1.64 U2.8 U3.2 | length 6284.1
  Top Layer w10: C8.2 1130,1931.21 U1.64 ; U1.1 1311.29,1949.92 1311.29,1841.29 C6.2@1300,1830 ; U1.32 1315,2533.79 C4.2 ; U1.13 1450.48,2144.52 1525,2070 C9.2
  Top Layer w15: v1(1775,885) 1833.62,885 U2.8 ; U3.2 2009.84,2898.31 v2(2010,2898.15) ; v3(2242.8,1682.2) SW4.1
  Top Layer w30: v3(1840,1040) 1840,911.38 1850,901.38 U2.8 ; C21.2@1969.37,2830 U3.2
  Bottom Layer w15: R12.2 R8.1 ; Q2.2 690,665 C22.1 ; R6.1 R4.1 1500,655 1510,645 1510,475.3 1490,455.3 1490,370 1500,360 1630,360 1645,375 R3.1 1645,545 1660,560 1725,560 1740,575 C1.2 1740,866.69 1758.31,885 v1(1775,885) ; v3(1840,1040) 1840,1565 1885,1610 R18.2 1995,1660 2017.2,1682.2 v3(2242.8,1682.2) ; C20.2 2010,2984.37 v2(2010,2898.15) 2010,2870 2035,2845 2270,2845 2285,2860 2285,2975 2273.5,2986.5 R17.1
  Bottom Layer w30: C22.1 1110,1040 ; C10.1 1110,1040 ; v3(1840,1040) 1110,1040
VCC5: C16.1 C18.2 C19.2 FUSE1.1 LS1.1 P2.2 PP1.5 PP1.6 PP1.7 PP1.8 PP1.9 PP1.10 U3.3 | length 713.5
  Top Layer w30: U3.3 2062.84,2895 2066.15,2898.31 v3(2105,2898.31) 2108.31,2895 C18.2
  Bottom Layer w30: P2.2 1922.5,3222.5 1965,3180 2050,3180 2105,3125 2105,3050 ; C19.2 2090,3065 2105,3050 ; v3(2105,2898.31) 2105,3050
pads on no net: C10.2 C11.4 C11.5 J1.4 PP1.1 PP1.4 PT1.9 U2.9 U2.10 U2.11 U2.12 U2.13 U2.14 U3.4
copper on no net:
  other v4: 150,135 2190,135 150,3265 2190,3265

## Keep-outs
Keep-Out Layer:
  the board outline again, w10